# Altium PCB 驱动.pcbdoc (part 2 of 2)
Units mil, origin at the board's own origin, x right, y up, seen from the top; angles counter-clockwise.
Board outline 18731.41 x 3255.76 mil, 2 copper layers (Top Layer, Bottom Layer); 107 components, 212 nets, 609 pads, 80 vias.
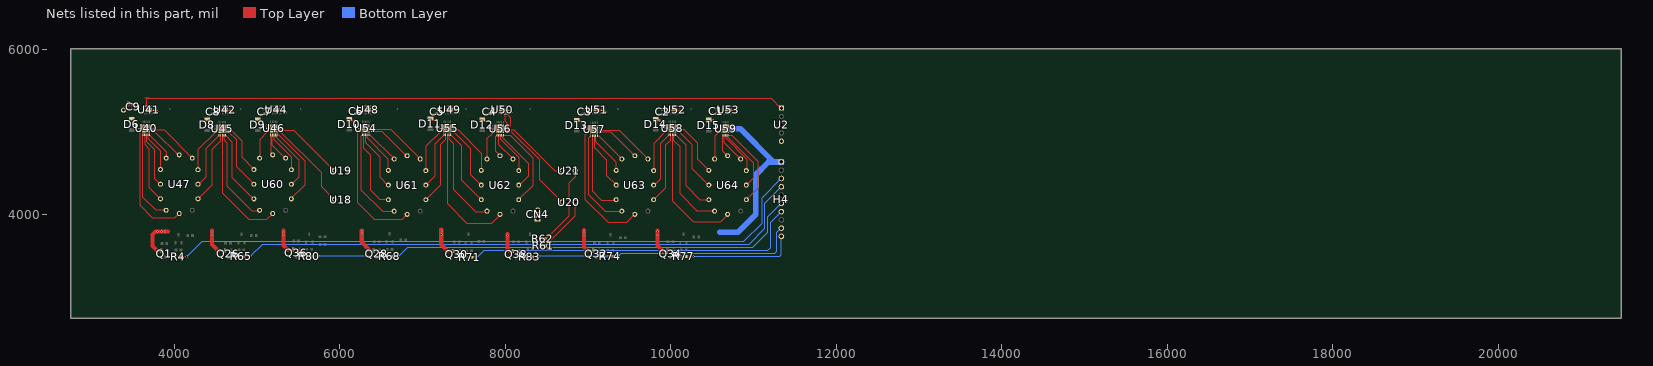
[diagram p2: the nets of this part, all layers, seen from the top]

## Via types
v1: diameter 24.02, hole 12.01, Top Layer to Bottom Layer, 80 vias

## Nets (pads, with @x,y where several pads share a name; then routed paths per layer and width w, separated by ;. In a path a pad name is that pad's centre, name@x,y a point inside that pad or via, vN(x,y) a via of type N, cw(c..) or ccw(c..) an arc to the next point about the centre after c; other vN are vias at no path point) (continued)
GND: C1.2 C2.2 C3.2 C4.2 C5.2 C6.2 C7.2 C8.2 C9.2 pad.1 U2.5 U41.8 U41.13 U41.17 U42.8 U42.13 U42.17 U44.8 U44.13 U44.17 U48.8 U48.13 U48.17 U49.8 U49.13 U49.17 U50.8 U50.13 U50.17 U51.8 U51.13 U51.17 U52.8 U52.13 U52.17 U53.8 U53.13 U53.17 | length 2066.7
  Top Layer w10: U41.13@3679.02,5315.26 3679.02,5281.68 3700.85,5259.85 U41.8@3754.12,5259.85 3785.3,5259.85 v1(3795.15,5250) ; v1(4415.15,5220) 4467.1,5220 C8.2@4468.27,5221.16 ; U42.13@4600.16,5315.26 4600.16,5273.67 4613.98,5259.85 U42.8@4675.26,5259.85 4700.3,5259.85 v1(4720.15,5240) ; v1(5045.15,5215) 5088.25,5215 C7.2@5093.22,5219.96 ; U44.13@5223.98,5315.81 5223.98,5271.99 5235.56,5260.4 U44.8@5299.07,5260.4 5329.75,5260.4 v1(5350.15,5240) ; v1(6145.15,5220) 6192.99,5220 C6.2@6195,5222.01 ; U48.13@6329.84,5316.2 6329.84,5272.12 6341.17,5260.79 U48.8@6404.94,5260.79 6429.36,5260.79 v1(6445.15,5245) ; v1(7130.15,5220) 7173.93,5220 C5.2@7175,5221.07 ; U49.13@7317.27,5315.54 7317.27,5260.13 U49.8@7392.37,5260.13 7420.02,5260.13 v1(7440.15,5240) ; v1(7765.15,5220) 7811.21,5220 C4.2@7812.28,5221.07 ; U50.13@7954.41,5314.87 7954.41,5273.9 7968.85,5259.46 U50.8@8029.51,5259.46 8055.69,5259.46 v1(8075.15,5240) ; v1(8915.15,5220) 8915.9,5220.75 C3.2@8959.25,5220.75 ; U51.13@9091.26,5314.55 9091.26,5263.89 9096.01,5259.14 U51.8@9166.36,5259.14 9201.01,5259.14 v1(9215.15,5245) ; v1(9855.15,5220) 9897.64,5220 C2.2@9900,5217.64 ; U52.13@10035.16,5314.55 10035.16,5274.94 10050.96,5259.14 U52.8@10110.26,5259.14 10141.01,5259.14 v1(10155.15,5245) ; v1(10505.15,5225) 10548.63,5225 C1.2@10550.22,5223.41 ; U53.13@10680.16,5316.36 10680.16,5273.03 10692.24,5260.95 U53.8@10755.26,5260.95 10794.2,5260.95 v1(10800.15,5255)
  Top Layer w30: v1(3440.15,5359.52) 3440.15,5343.09 v1(3440.15,5325) 3450.35,5335.2 C9.2@3500.75,5335.2
  Top Layer w50: 3437.06,5340 3440.15,5343.09
H0: U50.6 U56.20 | length 152.5
  Top Layer w10: U50.6@7993.78,5223.73 7993.78,5136.85 8015,5115.63 8015,5081.37 U56.20@8014.06,5080.43
H1: U50.7 U56.19 | length 222.5
  Top Layer w10: U50.7@8013.46,5223.73 8060,5177.19 8060,5070.63 8050,5060.63 8014.16,5060.63 U56.19@8014.06,5060.74
H_HV1: R61.1 U20.1 | length 674.3
  Top Layer w10: R61.1@8484.81,3630 8484.81,3631.13 8843.74,3990.06 U20.1@8843.74,4155.63
H_HV2: R62.1 U21.1 | length 971.6
  Top Layer w10: R62.1@8491.27,3710 8765.15,3983.88 8765.15,4382.04 8843.74,4460.63 U21.1@8843.74,4535.63
MOSI: U2.1 U41.14 | length 7836.1
  Top Layer w8: 3645,5410.63 3680,5410.63 ; U41.14@3659.33,5325.26 3659.33,5389.96 3680,5410.63 ; 3685,5415.63 3680,5410.63
  Top Layer w10: 3680,5410.63 11209.52,5410.63 U2.1@11330.15,5290
NIX_A0: U45.12 U47.0 | length 885.7
  Top Layer w10: U47.0@4285.2,4190.05 4460,4364.85 4460,4795.63 4560.78,4896.41 U45.12@4560.78,4961.62
NIX_A1: U40.11 U47.1 | length 1099.6
  Top Layer w10: U40.11@3619.96,4966.89 3619.96,4215.68 3780.63,4055 3900.03,4055 U47.1@3901.3,4056.27
NIX_A2: U40.12 U47.2 | length 854
  Top Layer w10: U40.12@3639.64,4966.89 3639.64,4851 3690,4800.63 3690,4335.15 U47.2@3832.4,4192.75
NIX_A3: U40.13 U47.3 | length 665.8
  Top Layer w10: U40.13@3659.33,4966.89 3659.33,4891.31 3760,4790.63 3760,4445.15 U47.3@3832.4,4372.75
NIX_A4: U40.14 U47.4 | length 482
  Top Layer w10: U40.14@3679.01,4966.89 3679.01,4926.63 3830,4775.63 3830,4550.87 U47.4@3832.4,4548.47
NIX_A5: U40.15 U47.5 | length 379.5
  Top Layer w10: U40.15@3698.7,4966.89 3901.3,4764.29 U47.5@3901.3,4686.27 U47.5@3901.3,4671.27
NIX_A6: U40.16 U47.6 | length 456.4
  Top Layer w10: U40.16@3738.07,5006.26 3764.37,5006.26 4058.8,4711.83 U47.6@4058.8,4725.57
NIX_A7: U40.17 U47.7 | length 618.9
  Top Layer w10: U40.17@3738.07,5025.94 3876.63,5025.94 U47.7@4216.3,4686.27
NIX_A8: U45.10 U47.8 | length 559.4
  Top Layer w10: U47.8@4285.2,4531.27 4285.2,4784.46 U45.10@4501.73,5000.99
NIX_A9: U45.11 U47.9 | length 707.6
  Top Layer w10: U47.9@4285.2,4360.05 4380,4454.85 4380,4800.52 U45.11@4541.1,4961.62
NIX_ADOT: U40.10 U47.DOT | length 1450.2
  Top Layer w10: U40.10@3580.59,5006.26 3580.59,4120.05 3735.63,3965 4006.83,3965 U47.DOT@4058.8,4016.97
NIX_B0: U46.15 U60.0 | length 983.2
  Top Layer w10: U46.15@5242.99,4965.95 5264.2,4965.95 5575,4655.15 5575,4359.85 U60.0@5414.4,4199.25
NIX_B1: U45.14 U60.1 | length 1150.6
  Top Layer w10: U45.14@4600.15,4961.62 4600.15,4905.48 4640,4865.63 4640,4346.99 4941.36,4045.63 5020.5,4045.63 U60.1@5030.5,4055.63
NIX_B2: U45.15 U60.2 | length 914.6
  Top Layer w10: U45.15@4619.84,4961.62 4695,4886.46 4695,4455.15 U60.2@4961.6,4188.55
NIX_B3: U45.16 U60.3 | length 752.7
  Top Layer w10: U45.16@4659.21,5000.99 4745,4915.2 4745,4590.15 U60.3@4961.6,4373.55
NIX_B4: U45.17 U60.4 | length 610.4
  Top Layer w10: U45.17@4659.21,5020.67 4689.97,5020.67 4815,4895.63 4815,4700.15 U60.4@4961.6,4553.55
NIX_B5: U46.10 U60.5 | length 373.8
  Top Layer w10: U60.5@5030.5,4670.63 5030.5,4910.94 U46.10@5124.88,5005.32
NIX_B6: U46.11 U60.6 | length 253.6
  Top Layer w10: U46.11@5164.25,4965.95 5164.25,4745.9 U60.6@5188,4722.15
NIX_B7: U46.12 U60.7 | length 353.2
  Top Layer w10: U46.12@5183.93,4965.95 5183.93,4841.22 U60.7@5345.5,4679.65
NIX_B8: U46.13 U60.8 | length 507.6
  Top Layer w10: U46.13@5203.62,4965.95 5203.62,4911.53 5414.4,4700.75 U60.8@5414.4,4545.63
NIX_B9: U46.14 U60.9 | length 755.9
  Top Layer w10: U46.14@5223.3,4965.95 5223.3,4946.85 5505,4665.15 5505,4454.85 U60.9@5414.4,4364.25
NIX_BDOT: U45.13 U60.DOT | length 1466.4
  Top Layer w10: U45.13@4580.47,4961.62 4580.47,4264.68 4900.15,3945 5116.67,3945 U60.DOT@5188,4016.33
NIX_C0: U55.12 U61.0 | length 881.6
  Top Layer w10: U61.0@7039.28,4184.13 7220,4364.85 7220,4855.63 7277.89,4913.53 U55.12@7277.89,4966.89
NIX_C1: U54.11 U61.1 | length 1176.8
  Top Layer w10: U54.11@6270.78,4967.32 6255,4951.53 6255,4305.63 6515.63,4045 6654.74,4045 U61.1@6655.38,4045.63
NIX_C2: U54.12 U61.2 | length 961.7
  Top Layer w10: U54.12@6290.46,4967.32 6290.46,4805.17 6375,4720.63 6375,4300.63 6490.63,4185 6584.91,4185 U61.2@6586.48,4183.43
NIX_C3: U54.13 U61.3 | length 728.1
  Top Layer w10: U54.13@6310.15,4967.32 6310.15,4870.48 6485,4695.63 6485,4455.15 U61.3@6586.48,4353.67
NIX_C4: U54.14 U61.4 | length 545.8
  Top Layer w10: U54.14@6329.83,4967.32 6329.83,4930.8 6586.48,4674.16 U61.4@6586.48,4527.83
NIX_C5: U54.15 U61.5 | length 426.7
  Top Layer w10: U54.15@6349.52,4967.32 6363.66,4967.32 U61.5@6655.38,4675.63
NIX_C6: U54.16 U61.6 | length 542.6
  Top Layer w10: U54.16@6388.89,5006.69 6513.46,5006.69 U61.6@6809.05,4711.1
NIX_C7: U54.17 U61.7 | length 726.8
  Top Layer w10: U54.17@6388.89,5026.37 6618.78,5026.37 6969.52,4675.63 U61.7@6970.38,4675.63
NIX_C8: U55.10 U61.8 | length 555
  Top Layer w10: U61.8@7039.28,4525.63 7039.28,4826.7 U55.10@7218.84,5006.26
NIX_C9: U55.11 U61.9 | length 696.9
  Top Layer w10: U61.9@7039.28,4360.63 7145,4466.36 7145,4853.68 U55.11@7258.21,4966.89
NIX_CDOT: U54.10 U61.DOT | length 1571.3
  Top Layer w10: U54.10@6231.41,5006.69 6210,4985.27 6210,4155.63 6415.63,3950 6756.54,3950 U61.DOT@6812.88,4006.33
NIX_D0: U56.15 U62.0 | length 1041.8
  Top Layer w10: U56.15@7974.69,4962.32 8057.83,4962.32 8330,4690.15 8330,4354.85 U62.0@8161.4,4186.25
NIX_D1: U55.14 U62.1 | length 1200
  Top Layer w10: U55.14@7317.26,4966.89 7317.26,4918.37 7370,4865.63 7370,4310.63 7640.63,4040 7771.87,4040 U62.1@7777.5,4045.63
NIX_D2: U55.15 U62.2 | length 939.3
  Top Layer w10: U55.15@7336.95,4966.89 7465,4838.85 7465,4425.15 U62.2@7708.6,4181.55
NIX_D3: U55.16 U62.3 | length 787.3
  Top Layer w10: U55.16@7376.32,5006.26 7575,4807.59 7575,4490.15 U62.3@7708.6,4356.55
NIX_D4: U55.17 U62.4 | length 672
  Top Layer w10: U55.17@7376.32,5025.94 7429.69,5025.94 7708.6,4747.03 U62.4@7708.6,4522.83
NIX_D5: U56.10 U62.5 | length 368.8
  Top Layer w10: U62.5@7777.5,4665.63 7777.5,4922.61 U56.10@7856.58,5001.69
NIX_D6: U56.11 U62.6 | length 280.6
  Top Layer w10: U56.11@7895.95,4962.32 7875.15,4941.52 7875.15,4775 U62.6@7935,4715.15
NIX_D7: U56.12 U62.7 | length 357.9
  Top Layer w10: U56.12@7915.63,4962.32 7915.63,4854.52 U62.7@8092.5,4677.65
NIX_D8: U56.13 U62.8 | length 535.3
  Top Layer w10: U56.13@7935.32,4962.32 7935.32,4919.83 8161.4,4693.75 U62.8@8161.4,4520.63
NIX_D9: U56.14 U62.9 | length 790.7
  Top Layer w10: U56.14@7955,4962.32 7955,4944.79 8275,4624.79 8275,4464.85 U62.9@8161.4,4351.25
NIX_DDOT: U55.13 U62.DOT | length 1612.7
  Top Layer w10: U55.13@7297.58,4966.89 7297.58,4138.05 7535.63,3900 7835.15,3900 7935,3999.85 U62.DOT@7935,4006.33
NIX_E0: U58.12 U63.0 | length 872.9
  Top Layer w10: U63.0@9791.4,4181.25 9940,4329.85 9940,4845.63 9997.63,4903.27 U58.12@9997.63,4968.68
NIX_E1: U57.11 U63.1 | length 1212.3
  Top Layer w10: U57.11@9031.54,4956.89 9005,4930.35 9005,4245.63 9210.63,4040 9401.87,4040 U63.1@9407.5,4045.63
NIX_E2: U57.12 U63.2 | length 1001.6
  Top Layer w10: U57.12@9051.22,4956.89 9051.22,4289.41 9160.63,4180 9335.17,4180 U63.2@9338.6,4183.43
NIX_E3: U57.13 U63.3 | length 706.2
  Top Layer w10: U57.13@9070.91,4956.89 9070.91,4814.72 9220,4665.63 9220,4480.15 U63.3@9338.6,4361.55
NIX_E4: U57.14 U63.4 | length 536.8
  Top Layer w10: U57.14@9090.59,4956.89 9090.59,4885.04 9338.6,4637.03 U63.4@9338.6,4522.83
NIX_E5: U57.15 U63.5 | length 412.1
  Top Layer w10: U57.15@9110.28,4956.89 9130.25,4956.89 U63.5@9407.5,4679.64
NIX_E6: U57.16 U63.6 | length 531.9
  Top Layer w10: U57.16@9149.65,4996.26 9278.89,4996.26 9560.22,4714.93 U63.6@9565,4714.93
NIX_E7: U57.17 U63.7 | length 713.8
  Top Layer w10: U57.17@9149.65,5015.94 9382.19,5015.94 U63.7@9722.5,4675.63
NIX_E8: U58.10 U63.8 | length 548.4
  Top Layer w10: U63.8@9791.4,4520.63 9791.4,4860.87 U58.10@9938.58,5008.05
NIX_E9: U58.11 U63.9 | length 692
  Top Layer w10: U63.9@9791.4,4360.63 9792.8,4359.23 9799.38,4359.23 9870,4429.85 9870,4860.73 U58.11@9977.95,4968.68
NIX_EDOT: U57.10 U63.DOT | length 1580.1
  Top Layer w10: U57.10@8992.17,4996.26 8960,4964.09 8960,4190.63 9240.63,3910 9468.67,3910 U63.DOT@9565,4006.33
NIX_F0: U59.15 U64.0 | length 1003.8
  Top Layer w10: U59.15@10699.18,4962.39 10733.24,4962.39 11050,4645.63 11050,4319.85 U64.0@10911.4,4181.25
NIX_F1: U58.14 U64.1 | length 1247.8
  Top Layer w10: U58.14@10037,4968.68 10037,4893.63 10110,4820.63 10110,4255.63 10320,4045.63 U64.1@10527.5,4045.63
NIX_F2: U58.15 U64.2 | length 1014.1
  Top Layer w10: U58.15@10056.69,4968.68 10180,4845.38 10180,4355.63 10350.63,4185 10457.03,4185 U64.2@10458.6,4183.43
NIX_F3: U58.16 U64.3 | length 801.7
  Top Layer w10: U58.16@10096.06,5008.05 10250,4854.12 10250,4565.15 U64.3@10458.6,4356.55
NIX_F4: U58.17 U64.4 | length 680.5
  Top Layer w10: U58.17@10096.06,5027.73 10162.9,5027.73 10325,4865.63 10325,4670.15 U64.4@10458.6,4536.55
NIX_F5: U59.10 U64.5 | length 358.3
  Top Layer w10: U64.5@10527.5,4665.63 10527.5,4948.19 U59.10@10581.07,5001.76
NIX_F6: U59.11 U64.6 | length 279
  Top Layer w10: U59.11@10620.44,4962.39 10620.44,4774.71 U64.6@10685,4710.15
NIX_F7: U59.12 U64.7 | length 384.4
  Top Layer w10: U59.12@10640.12,4962.39 10640.12,4875.03 U64.7@10850.15,4665
NIX_F8: U59.13 U64.8 | length 534
  Top Layer w10: U59.13@10659.81,4962.39 10659.81,4930.34 10915,4675.15 10915,4539.23 U64.8@10911.4,4535.63
NIX_F9: U59.14 U64.9 | length 771.6
  Top Layer w10: U59.14@10679.49,4962.39 10679.49,4945.29 10995.15,4629.62 10995.15,4440 U64.9@10911.4,4356.25
NIX_FDOT: U58.13 U64.DOT | length 1614.6
  Top Layer w10: U58.13@10017.32,4968.68 10017.32,4168.31 10270.63,3915 10600.15,3915 10685,3999.85 U64.DOT@10685,4006.33
NIX_G0: U18.2 U46.16 | length 1089.4
  Top Layer w10: U46.16@5282.36,5005.32 5775,4512.68 5775,4345.15 U18.2@5934.25,4185.9
NIX_G1: U19.2 U46.17 | length 854.6
  Top Layer w10: U46.17@5282.36,5025 5444.89,5025 U19.2@5934.25,4535.63
NIX_H0: U20.2 U56.16 | length 1164
  Top Layer w10: U56.16@8014.06,5001.69 8078.46,5001.69 8415,4665.15 8415,4425.15 U20.2@8686.26,4153.89
NIX_H1: U21.2 U56.17 | length 873.4
  Top Layer w10: U56.17@8014.06,5021.37 8109.27,5021.37 8595,4535.63 U21.2@8686.26,4535.63
PGND: CN4.1 CN4.2 D6.2 D8.2 D9.2 D10.2 D11.2 D12.2 D13.2 D14.2 D15.2 H4.1 pad.22 Q1.2 Q26.2 Q28.2 Q30.2 Q32.2 Q34.2 Q36.2 Q38.2 U40.8 U40.21 U45.8 U45.21 U46.8 U46.21 U54.8 U54.21 U55.8 U55.21 U56.8 U56.21 U57.8 U57.21 U58.8 U58.21 U59.8 U59.21 | length 6206.4
  Top Layer w10: U40.8@3580.59,5045.63 U40.21@3659.33,5045.63 ; U45.8@4501.73,5040.36 U45.21@4580.47,5040.36 ; U46.8@5124.88,5044.69 U46.21@5203.62,5044.69 ; U54.8@6231.41,5046.06 U54.21@6310.15,5046.06 ; U55.8@7218.84,5045.63 U55.21@7297.58,5045.63 ; U56.8@7856.58,5040.63 U56.21@7935.32,5040.63 ; U57.8@8992.17,5035.63 U57.21@9070.91,5035.63 ; U58.8@9938.58,5047.42 U58.21@10017.32,5047.42 ; U59.8@10581.07,5041.13 10582.19,5040 pad.22@10660.15,5040
  Top Layer w20: D6.2@3485,5159.8 3489.77,5159.8 v1(3530.05,5119.53) ; D8.2@4400,5157.56 4432.56,5125 v1(4460.15,5125) ; D9.2@5005,5157.56 5027.56,5135 v1(5065.15,5135) ; D10.2@6111.42,5162.56 6133.98,5140 v1(6170.15,5140) ; D11.2@7095,5167.56 7117.56,5145 v1(7160.15,5145) ; D12.2@7720,5157.56 7742.56,5135 v1(7785.15,5135) ; D13.2@8865,5150.69 8880.69,5135 v1(8920.15,5135) ; D14.2@9815,5162.56 9837.56,5140 v1(9870.15,5140) ; D15.2@10455,5152.56 10467.56,5140 v1(10515.15,5140)
  Top Layer w30: 3788.53,3569.37 Q1.2@3842.75,3569.37 ; 4529.71,3569.37 Q26.2@4612.75,3569.37 ; 5367.04,3579.37 Q36.2@5437.75,3579.37 ; 6360.78,3569.37 Q28.2@6407.75,3569.37 ; 7300.78,3564.37 Q30.2@7372.75,3564.37 ; 8050.78,3564.37 Q38.2@8092.75,3564.37 ; 8990.78,3569.37 Q32.2@9062.75,3569.37 ; 9900.78,3569.37 Q34.2@9957.75,3569.37
  Top Layer w50: 3788.53,3569.37 3735.15,3622.75 3735.15,3765 3770.5,3800.36 v1(3798.22,3800.36) v1(3844.81,3800.36) v1(3887.86,3800.36) 3925.15,3800.36 ; 4455.5,3810 v1(4455.5,3795.3) v1(4455.5,3757.43) 4455.5,3643.58 4529.71,3569.37 ; 5317.04,3810 v1(5317.04,3795.21) v1(5317.04,3757.33) 5317.04,3629.37 5367.04,3579.37 ; v1@6265.15,3810 v1(6265.15,3760.68) 6265.15,3665 6360.78,3569.37 ; 7225.15,3825 v1(7225.15,3807.27) v1(7225.15,3763.33) 7225.15,3640 7300.78,3564.37 ; 8025.15,3770 v1(8025.15,3752.91) 8025.15,3590 8050.78,3564.37 ; 8950.15,3815 v1(8950.15,3800.83) v1(8950.15,3759.92) 8950.15,3610 8990.78,3569.37 ; 9840.15,3810 v1(9840.15,3796.95) v1(9840.15,3759.07) 9840.15,3630 9900.78,3569.37
  Bottom Layer w70: 10590.15,3790 10810.15,3790 11025.15,4005 11025.15,4485 11180.15,4640 11240.15,4640 ; pad.22@10660.15,5040 10840.15,5040 11240.15,4640 ; H4.1@11335.15,4640 11240.15,4640
  other v1: 6265.15,3800.07
SWITCH1: H4.3 R4.1 | length 7855.8
  Top Layer w10: R4.1@4079.28,3495.4 4105.16,3495.4 4105.39,3495.63 v1(4150,3495.63)
  Bottom Layer w10: v1(4150,3495.63) 4329.37,3675 10875.15,3675 11095.15,3895 11095.15,4200 H4.3@11335.15,4440 H4.3@11365.15,4440
SWITCH2: H4.4 R65.1 | length 7051.9
  Top Layer w10: R65.1@4839.81,3500 4919.37,3500 v1(4920,3500.63)
  Bottom Layer w10: v1(4920,3500.63) 5059.37,3640 10940.15,3640 11130.15,3830 11130.15,4135 H4.4@11335.15,4340 H4.4@11365.15,4340
SWITCH3: H4.6 R68.1 R80.1 | length 6157
  Top Layer w10: R80.1@5659.21,3503.19 5747.59,3503.19 v1(5750.15,3500.63) ; R68.1@6634.21,3498.19 6660.09,3498.19 6662.53,3500.63 v1(6710,3500.63)
  Bottom Layer w10: v1(5750.15,3500.63) v1(6710,3500.63) 6814.37,3605 10985.15,3605 11165.15,3785 11165.15,3970 H4.6@11335.15,4140 H4.6@11365.15,4140
SWITCH4: H4.7 R71.1 | length 4175.3
  Top Layer w10: R71.1@7599.21,3488.19 7657.44,3488.19 v1(7660,3485.63)
  Bottom Layer w10: v1(7660,3485.63) 7739.37,3565 11165.15,3565 11200.15,3600 11200.15,3905 H4.7@11335.15,4040 H4.7@11365.15,4040
SWITCH5: H4.9 R74.1 R83.1 | length 3387.4
  Top Layer w10: R83.1@8326.84,3493.19 8398.65,3493.19 v1(8405,3499.54) ; R74.1@9294.81,3500 9320.68,3500 9321.9,3501.22 v1(9365,3501.22)
  Bottom Layer w10: v1(8405,3499.54) 8406.68,3501.22 v1(9365,3501.22) 9393.78,3530 11250.15,3530 11275.15,3555 11275.15,3785 11330.15,3840 H4.9@11365.15,3840
SWITCH6: H4.10 R77.1 | length 1393.4
  Top Layer w10: R77.1@10184.21,3498.19 10273.97,3498.19 v1(10275.15,3497.01)
  Bottom Layer w10: v1(10275.15,3497.01) 11312.16,3497.01 11325.15,3510 11325.15,3700 H4.10@11365.15,3740
pads on no net: H4.5 H4.8 U40.7 U40.18 U45.7 U45.18 U46.7 U46.18 U53.6 U53.7 U53.9 U54.7 U54.18 U55.7 U55.18 U56.7 U56.18 U57.7 U57.18 U58.7 U58.18 U59.7 U59.16 U59.17 U59.18 U59.19 U59.20

## Polygon pours and split planes (outlines as drawn)
PGND on Bottom Layer (solid, remove dead copper, pour order 0): 3400,4965.63 5665,4965.63 5740,5040.63 5890,5040.63 5975,4955.63 10755,4955.63 10755,5175.63 10755.04,5180.63 3400,5180.63
PGND on Bottom Layer (solid, remove dead copper, pour order 2): 8250.71,4149.39 8565.95,4149.39 8565.95,3895 10640.15,3895 10640.15,3715 3765.15,3715 3765.15,3895 8250.71,3895
GND on Bottom Layer (solid, remove dead copper, pour order 4): 11455.15,4941.05 11245.86,4941.05 11245,4996.53 10885.15,5290 10610.62,5290 10610.62,5246.83 10610,5246.21 10510.15,5246.21 10510.15,5292.86 9950.74,5292.86 9950.74,5235.59 9950.15,5235 9855.15,5235 9835.15,5275 9825.15,5293.36 9004.07,5293.36 9004.07,5239.99 8915.15,5239.99 8915.15,5293.36 7855.9,5293.36 7855.9,5240.99 7774.16,5240.99 7770.15,5245 7770.15,5293.36 7220.15,5293.36 7220.15,5237.5 7127.65,5237.5 7125.15,5240 7125.15,5293.86 6250.15,5293.86 6250.15,5243.15 6249.68,5242.68 6146.11,5242.68 6146.11,5294.86 5148.06,5294.86 5148.06,5242.92 5145.15,5240 5040.15,5240 5040.15,5295.36 4525.15,5295.36 4525.15,5240.26 4525,5240.11 4411.88,5240.11 4411.88,5293.27 4410.15,5295 3640.15,5295 3640.15,5240 3457.23,5240 3457.23,5310.32 3550.15,5310.32 3550.15,5435 3295.03,5435 3295.03,5199.12 10780.15,5199.12 11199.27,4780 11455.15,4780

## Keep-outs
Board Outline Layer:
  circle w1: c3160.15,5600 r66.93
  region: 3227.08,5600 cw(c3160.15,5600) 3093.22,5600 cw(c3160.15,5600)
  circle w1: c3155.15,3510 r66.93
  region: 3222.08,3510 cw(c3155.15,3510) 3088.22,3510 cw(c3155.15,3510)
  circle w1: c11600.15,3505 r66.93
  region: 11667.08,3505 cw(c11600.15,3505) 11533.22,3505 cw(c11600.15,3505)
  circle w1: c11605.15,5600 r66.93
  region: 11672.08,5600 cw(c11605.15,5600) 11538.22,5600 cw(c11605.15,5600)
  lines w10: 3000,3348.22 3005,5755.76 3915.15,5755.76 3915.15,5446.38 11245.15,5447.17 11245.15,5753.84 11760,5753.84 11760,3350.63 3200,3350.63 3000,3348.22

## Other copper
Top Layer:
  drawing of 699 lines, arcs and shapes, not listed
Bottom Layer:
  region net SWITCH6: 11336.1,3703.88 11321.61,3703.54 11322.13,3704.31 11322.26,3705.17 11322.06,3706.12 11321.57,3707.15 11319.87,3709.36 11317.5,3711.69 11312.12,3716.34 11309.78,3718.44 11308.13,3720.26 11357.77,3715.34 11356.13,3713.94 11354.6,3712.82 11351.79,3711.27 11349.23,3710.36 11346.8,3709.75 11344.38,3709.13 11341.87,3708.16 11340.54,3707.45 11339.15,3706.52 11337.67,3705.35
  region net SWITCH6: 11336.49,3704.27 11321.61,3703.54 11322.13,3704.31 11322.27,3705.19 11322.07,3706.15 11321.57,3707.19 11319.85,3709.42 11317.45,3711.78 11312.01,3716.48 11309.65,3718.61 11307.99,3720.45 11358.17,3715.72 11356.56,3714.29 11355.04,3713.16 11353.61,3712.27 11352.25,3711.59 11349.69,3710.67 11347.25,3710.08 11344.82,3709.48 11342.29,3708.53 11340.95,3707.82 11339.55,3706.91 11338.07,3705.74
  region net SWITCH5: 11302.07,3804.85 11298.73,3815.65 11299.68,3816.82 11300.44,3818.22 11301.02,3819.81 11301.45,3821.57 11301.94,3825.46 11302.06,3829.68 11301.84,3838.21 11301.84,3842.08 11302.12,3845.38 11333.47,3806.58 11330.9,3806.78 11328.48,3807.12 11324.01,3808.01 11319.96,3808.98 11316.22,3809.73 11314.43,3809.94 11312.68,3809.98 11310.94,3809.83 11309.21,3809.44 11307.47,3808.78 11305.71,3807.82 11303.92,3806.53
  region net SWITCH4: 11306.35,4004.13 11299.27,4011.2 11301.04,4013.12 11302.38,4014.94 11303.36,4016.67 11304,4018.35 11304.36,4019.99 11304.48,4021.61 11304.4,4023.24 11304.16,4024.89 11303.38,4028.39 11302.49,4032.26 11301.83,4036.69 11301.69,4039.17 11301.74,4041.86 11337.01,4006.59 11334.32,4006.54 11331.84,4006.68 11327.41,4007.34 11323.53,4008.23 11320.04,4009.01 11318.39,4009.25 11316.76,4009.33 11315.14,4009.22 11313.5,4008.85 11311.82,4008.21 11310.09,4007.23 11308.27,4005.89
  region net SWITCH3: 11306.35,4104.13 11299.27,4111.2 11301.04,4113.12 11302.38,4114.94 11303.36,4116.67 11304,4118.35 11304.36,4119.99 11304.48,4121.61 11304.4,4123.24 11304.16,4124.89 11303.38,4128.39 11302.49,4132.26 11301.83,4136.69 11301.69,4139.17 11301.74,4141.86 11337.01,4106.59 11334.32,4106.54 11331.84,4106.68 11327.41,4107.34 11323.53,4108.23 11320.04,4109.01 11318.39,4109.25 11316.76,4109.33 11315.14,4109.22 11313.5,4108.85 11311.82,4108.21 11310.09,4107.23 11308.27,4105.89
  region net SWITCH2: 11306.35,4304.13 11299.27,4311.2 11301.04,4313.12 11302.38,4314.94 11303.36,4316.67 11304,4318.35 11304.36,4319.99 11304.48,4321.61 11304.4,4323.24 11304.16,4324.89 11303.38,4328.39 11302.49,4332.26 11301.83,4336.69 11301.69,4339.17 11301.74,4341.86 11337.01,4306.59 11334.32,4306.54 11331.84,4306.68 11327.41,4307.34 11323.53,4308.23 11320.04,4309.01 11318.39,4309.25 11316.76,4309.33 11315.14,4309.22 11313.5,4308.85 11311.82,4308.21 11310.09,4307.23 11308.27,4305.89
  region net SWITCH1: 11306.35,4404.13 11299.27,4411.2 11301.04,4413.12 11302.38,4414.94 11303.36,4416.67 11304,4418.35 11304.36,4419.99 11304.48,4421.61 11304.4,4423.24 11304.16,4424.89 11303.38,4428.39 11302.49,4432.26 11301.83,4436.69 11301.69,4439.17 11301.74,4441.86 11337.01,4406.59 11334.32,4406.54 11331.84,4406.68 11327.41,4407.34 11323.53,4408.23 11320.04,4409.01 11318.39,4409.25 11316.76,4409.33 11315.14,4409.22 11313.5,4408.85 11311.82,4408.21 11310.09,4407.23 11308.27,4405.89
  region net CLK: 11301.88,5117.61 11307.54,5123.27 11309.41,5121.55 11311.17,5120.26 11312.84,5119.33 11314.43,5118.74 11315.99,5118.43 11317.52,5118.37 11319.06,5118.5 11320.63,5118.79 11327.61,5120.62 11331.88,5121.34 11334.28,5121.49 11336.9,5121.45 11303.7,5088.25 11303.66,5090.87 11303.81,5093.27 11304.53,5097.54 11306.36,5104.52 11306.65,5106.09 11306.78,5107.63 11306.72,5109.16 11306.41,5110.71 11305.82,5112.31 11304.89,5113.98 11303.6,5115.74
  region net SWITCH1: 4158.07,3510.77 4165.14,3503.7 4164.41,3502.85 4163.79,3501.87 4162.84,3499.66 4162.26,3497.28 4161.99,3494.97 4149.33,3507.62 4151.65,3507.89 4154.02,3508.47 4156.24,3509.42 4157.21,3510.04
  region net SWITCH2: 4928.07,3515.77 4935.14,3508.7 4934.41,3507.85 4933.79,3506.87 4932.84,3504.66 4932.26,3502.28 4931.99,3499.97 4919.33,3512.62 4921.65,3512.89 4924.02,3513.47 4926.24,3514.42 4927.21,3515.04
  region net SWITCH4: 7668.07,3500.77 7675.14,3493.7 7674.41,3492.85 7673.79,3491.87 7672.84,3489.66 7672.26,3487.28 7671.99,3484.97 7659.33,3497.62 7661.65,3497.89 7664.02,3498.47 7666.24,3499.42 7667.21,3500.04
  region net CLK: 5273.74,5346 5273.74,5354 5275.05,5354.11 5276.23,5354.43 5277.3,5354.91 5278.3,5355.55 5280.19,5357.13 5282.14,5358.95 5282.14,5341.05 5280.19,5342.87 5278.3,5344.45 5277.3,5345.09 5276.23,5345.57 5275.05,5345.89
  region net CLK: 5303.55,5359 5309.56,5351 5308.34,5350.87 5307.09,5350.5 5305.84,5349.93 5304.64,5349.19 5303.54,5348.31 5302.56,5347.33 5301.75,5346.28 5301.15,5345.2 5293.7,5361.47 5298.56,5359.77 5300.81,5359.21
  region net CLK: 3756.56,5354 3756.56,5346 3755.25,5345.89 3754.07,5345.57 3753,5345.09 3752,5344.45 3750.11,5342.87 3748.15,5341.05 3748.15,5358.95 3750.11,5357.13 3752,5355.55 3753,5354.91 3754.07,5354.43 3755.25,5354.11
  region net CLK: 4643.74,5346 4643.74,5354 4645.05,5354.11 4646.23,5354.43 4647.3,5354.91 4648.3,5355.55 4650.19,5357.13 4652.14,5358.95 4652.14,5341.05 4650.19,5342.87 4648.3,5344.45 4647.3,5345.09 4646.23,5345.57 4645.05,5345.89
  region net CLK: 4676.56,5354 4676.56,5346 4675.25,5345.89 4674.07,5345.57 4673,5345.09 4672,5344.45 4670.11,5342.87 4668.15,5341.05 4668.15,5358.95 4670.11,5357.13 4672,5355.55 4673,5354.91 4674.07,5354.43 4675.25,5354.11
  region net CLK: 8003.74,5351 8003.74,5359 8005.05,5359.11 8006.23,5359.43 8007.3,5359.91 8008.3,5360.55 8010.19,5362.13 8012.14,5363.95 8012.14,5346.05 8010.19,5347.87 8008.3,5349.45 8007.3,5350.09 8006.23,5350.57 8005.05,5350.89
  region net CLK: 8036.56,5359 8036.56,5351 8035.25,5350.89 8034.07,5350.57 8033,5350.09 8032,5349.45 8030.11,5347.87 8028.15,5346.05 8028.15,5363.95 8030.11,5362.13 8032,5360.55 8033,5359.91 8034.07,5359.43 8035.25,5359.11
  region net CLK: 10720.74,5351 10726.74,5359 10729.48,5359.21 10731.74,5359.77 10736.6,5361.47 10729.14,5345.2 10728.55,5346.28 10727.74,5347.33 10726.76,5348.31 10725.65,5349.19 10724.46,5349.93 10723.21,5350.5 10721.96,5350.87
  region net CLK: 10756.56,5354 10756.56,5346 10755.25,5345.89 10754.07,5345.57 10753,5345.09 10752,5344.45 10750.11,5342.87 10748.15,5341.05 10748.15,5358.95 10750.11,5357.13 10752,5355.55 10753,5354.91 10754.07,5354.43 10755.25,5354.11
  region net +5V: 3796.41,5323.13 3796.41,5308.13 3794.02,5308.23 3791.88,5308.26 3790.88,5308.14 3789.91,5307.86 3788.95,5307.4 3788.01,5306.68 3788.01,5324.58 3788.95,5323.87 3789.91,5323.4 3790.88,5323.13 3791.88,5323.01 3794.02,5323.04
  region net +5V: 3763.59,5308.13 3763.59,5323.13 3765.98,5323.04 3768.12,5323.01 3769.12,5323.13 3770.09,5323.4 3771.05,5323.87 3771.99,5324.58 3771.99,5306.68 3771.05,5307.4 3770.09,5307.86 3769.12,5308.14 3768.12,5308.26 3765.98,5308.23
  region net +5V: 3601.3,5297.54 3611.91,5286.93 3610.15,5285.31 3608.62,5283.82 3608,5283.03 3607.5,5282.15 3607.16,5281.14 3606.99,5279.97 3594.33,5292.62 3595.51,5292.79 3596.51,5293.13 3597.39,5293.63 3598.19,5294.25 3599.68,5295.79
  region net +5V: 3578.59,5273.13 3578.59,5288.13 3580.98,5288.04 3583.12,5288.01 3584.12,5288.13 3585.09,5288.4 3586.05,5288.87 3586.99,5289.58 3586.99,5271.68 3586.05,5272.4 3585.09,5272.86 3584.12,5273.14 3583.12,5273.26 3580.98,5273.23
  region net CLK: 6378.74,5351 6378.74,5359 6380.05,5359.11 6381.23,5359.43 6382.3,5359.91 6383.3,5360.55 6385.19,5362.13 6387.14,5363.95 6387.14,5346.05 6385.19,5347.87 6383.3,5349.45 6382.3,5350.09 6381.23,5350.57 6380.05,5350.89
  region net CLK: 6411.56,5359 6411.56,5351 6410.25,5350.89 6409.07,5350.57 6408,5350.09 6407,5349.45 6405.11,5347.87 6403.15,5346.05 6403.15,5363.95 6405.11,5362.13 6407,5360.55 6408,5359.91 6409.07,5359.43 6410.25,5359.11
  region net +5V: 5333.59,5308.31 5333.59,5323.31 5335.98,5323.22 5338.12,5323.18 5339.12,5323.31 5340.09,5323.58 5341.05,5324.05 5341.99,5324.76 5341.99,5306.86 5341.05,5307.57 5340.09,5308.04 5339.12,5308.31 5338.12,5308.43 5335.98,5308.4
  region net +5V: 5366.41,5323.31 5366.41,5308.31 5364.02,5308.4 5361.88,5308.43 5360.88,5308.31 5359.91,5308.04 5358.95,5307.57 5358.01,5306.86 5358.01,5324.76 5358.95,5324.05 5359.91,5323.58 5360.88,5323.31 5361.88,5323.18 5364.02,5323.22
  region net SWITCH5: 8420.08,3506.22 8422.58,3496.22 8421.47,3496.12 8420.31,3495.84 8418,3494.84 8415.87,3493.42 8414.18,3491.8 8411.68,3509.52 8413.61,3508.31 8415.69,3507.25 8417.86,3506.5
  region net SWITCH3: 6693.59,3495.63 6693.59,3505.63 6694.71,3505.72 6695.84,3505.97 6698.07,3506.87 6700.17,3508.13 6701.99,3509.58 6701.99,3491.68 6700.17,3493.13 6698.07,3494.4 6695.84,3495.29 6694.71,3495.55
  region net SWITCH3: 6718.07,3515.77 6725.14,3508.7 6724.41,3507.85 6723.79,3506.87 6722.84,3504.66 6722.26,3502.28 6721.99,3499.97 6709.33,3512.62 6711.65,3512.89 6714.02,3513.47 6716.24,3514.42 6717.21,3515.04
  region net +5V: 7461.41,5323.04 7461.41,5308.04 7459.02,5308.13 7456.88,5308.16 7455.88,5308.04 7454.91,5307.77 7453.95,5307.3 7453.01,5306.59 7453.01,5324.49 7453.95,5323.77 7454.91,5323.31 7455.88,5323.03 7456.88,5322.91 7459.02,5322.94
  region net +5V: 7428.59,5308.04 7428.59,5323.04 7430.98,5322.94 7433.12,5322.91 7434.12,5323.03 7435.09,5323.31 7436.05,5323.77 7436.99,5324.49 7436.99,5306.59 7436.05,5307.3 7435.09,5307.77 7434.12,5308.04 7433.12,5308.16 7430.98,5308.13
  region net CLK: 7358.74,5351 7358.74,5359 7360.05,5359.11 7361.23,5359.43 7362.3,5359.91 7363.3,5360.55 7365.19,5362.13 7367.14,5363.95 7367.14,5346.05 7365.19,5347.87 7363.3,5349.45 7362.3,5350.09 7361.23,5350.57 7360.05,5350.89
  region net CLK: 7391.56,5359 7391.56,5351 7390.25,5350.89 7389.07,5350.57 7388,5350.09 7387,5349.45 7385.11,5347.87 7383.15,5346.05 7383.15,5363.95 7385.11,5362.13 7387,5360.55 7388,5359.91 7389.07,5359.43 7390.25,5359.11
  region net +5V: 9861.45,5296.91 9872.06,5286.3 9870.3,5284.68 9868.77,5283.19 9868.15,5282.39 9867.65,5281.51 9867.31,5280.51 9867.14,5279.33 9854.48,5291.99 9855.65,5292.16 9856.66,5292.5 9857.54,5293 9858.34,5293.62 9859.83,5295.15
  region net +5V: 9838.24,5286.3 9848.85,5296.91 9850.47,5295.15 9851.96,5293.62 9852.76,5293 9853.64,5292.5 9854.64,5292.16 9855.82,5291.99 9843.16,5279.33 9842.99,5280.51 9842.65,5281.51 9842.15,5282.39 9841.53,5283.19 9840,5284.68
  region net CLK: 10078.74,5351 10078.74,5359 10080.05,5359.11 10081.23,5359.43 10082.3,5359.91 10083.3,5360.55 10085.19,5362.13 10087.14,5363.95 10087.14,5346.05 10085.19,5347.87 10083.3,5349.45 10082.3,5350.09 10081.23,5350.57 10080.05,5350.89
  region net CLK: 10111.56,5359 10111.56,5351 10110.25,5350.89 10109.07,5350.57 10108,5350.09 10107,5349.45 10105.11,5347.87 10103.15,5346.05 10103.15,5363.95 10105.11,5362.13 10107,5360.55 10108,5359.91 10109.07,5359.43 10110.25,5359.11
  region net CLK: 9171.56,5359 9171.56,5351 9170.25,5350.89 9169.07,5350.57 9168,5350.09 9167,5349.45 9165.11,5347.87 9163.15,5346.05 9163.15,5363.95 9165.11,5362.13 9167,5360.55 9168,5359.91 9169.07,5359.43 9170.25,5359.11
  region net CLK: 9138.74,5351 9138.74,5359 9140.05,5359.11 9141.23,5359.43 9142.3,5359.91 9143.3,5360.55 9145.19,5362.13 9147.14,5363.95 9147.14,5346.05 9145.19,5347.87 9143.3,5349.45 9142.3,5350.09 9141.23,5350.57 9140.05,5350.89
  region net +5V: 3556.08,5288.13 3557.02,5273.13 3554.62,5273.21 3552.45,5273.2 3551.44,5273.05 3550.46,5272.75 3549.53,5272.24 3548.62,5271.48 3547.67,5289.36 3548.66,5288.69 3549.63,5288.26 3550.6,5288.03 3551.59,5287.94
  region net +5V: 7771.45,5296.91 7782.06,5286.3 7780.3,5284.68 7778.77,5283.19 7778.15,5282.39 7777.65,5281.51 7777.31,5280.51 7777.14,5279.33 7764.48,5291.99 7765.65,5292.16 7766.66,5292.5 7767.54,5293 7768.34,5293.62 7769.83,5295.15
  region net +5V: 7748.24,5286.3 7758.85,5296.91 7760.47,5295.15 7761.96,5293.62 7762.76,5293 7763.64,5292.5 7764.64,5292.16 7765.82,5291.99 7753.16,5279.33 7752.99,5280.51 7752.65,5281.51 7752.15,5282.39 7751.53,5283.19 7750,5284.68
  region net +5V: 4691.13,5307.76 4691.13,5322.76 4693.52,5322.67 4695.65,5322.63 4696.66,5322.75 4697.63,5323.03 4698.58,5323.5 4699.53,5324.21 4699.53,5306.31 4698.58,5307.02 4697.63,5307.49 4696.66,5307.76 4695.65,5307.88 4693.52,5307.85
  region net +5V: 4723.95,5322.76 4723.95,5307.76 4721.56,5307.85 4719.42,5307.88 4718.42,5307.76 4717.45,5307.49 4716.49,5307.02 4715.54,5306.31 4715.54,5324.21 4716.49,5323.5 4717.45,5323.03 4718.42,5322.75 4719.42,5322.63 4721.56,5322.67
  region net +5V: 6433.59,5308.7 6433.59,5323.7 6435.98,5323.61 6438.12,5323.58 6439.12,5323.7 6440.09,5323.97 6441.05,5324.44 6441.99,5325.15 6441.99,5307.25 6441.05,5307.97 6440.09,5308.43 6439.12,5308.71 6438.12,5308.83 6435.98,5308.8
  region net +5V: 6466.41,5323.7 6466.41,5308.7 6464.02,5308.8 6461.88,5308.83 6460.88,5308.71 6459.91,5308.43 6458.95,5307.97 6458.01,5307.25 6458.01,5325.15 6458.95,5324.44 6459.91,5323.97 6460.88,5323.7 6461.88,5323.58 6464.02,5323.61
  region net +5V: 5051.45,5296.91 5062.06,5286.3 5060.3,5284.68 5058.77,5283.19 5058.15,5282.39 5057.65,5281.51 5057.31,5280.51 5057.14,5279.33 5044.48,5291.99 5045.65,5292.16 5046.66,5292.5 5047.54,5293 5048.34,5293.62 5049.83,5295.15
  region net +5V: 5028.24,5286.3 5038.85,5296.91 5040.47,5295.15 5041.96,5293.62 5042.76,5293 5043.64,5292.5 5044.64,5292.16 5045.82,5291.99 5033.16,5279.33 5032.99,5280.51 5032.65,5281.51 5032.15,5282.39 5031.53,5283.19 5030,5284.68
  region net +5V: 7113.24,5286.3 7123.85,5296.91 7125.47,5295.15 7126.96,5293.62 7127.76,5293 7128.64,5292.5 7129.64,5292.16 7130.82,5291.99 7118.16,5279.33 7117.99,5280.51 7117.65,5281.51 7117.15,5282.39 7116.53,5283.19 7115,5284.68
  region net +5V: 7136.45,5296.91 7147.06,5286.3 7145.3,5284.68 7143.77,5283.19 7143.15,5282.39 7142.65,5281.51 7142.31,5280.51 7142.14,5279.33 7129.48,5291.99 7130.65,5292.16 7131.66,5292.5 7132.54,5293 7133.34,5293.62 7134.83,5295.15
  region net +5V: 6151.45,5296.91 6162.06,5286.3 6160.3,5284.68 6158.77,5283.19 6158.15,5282.39 6157.65,5281.51 6157.31,5280.51 6157.14,5279.33 6144.48,5291.99 6145.65,5292.16 6146.66,5292.5 6147.54,5293 6148.34,5293.62 6149.83,5295.15
  region net +5V: 6128.24,5286.3 6138.85,5296.91 6140.47,5295.15 6141.96,5293.62 6142.76,5293 6143.64,5292.5 6144.64,5292.16 6145.82,5291.99 6133.16,5279.33 6132.99,5280.51 6132.65,5281.51 6132.15,5282.39 6131.53,5283.19 6130,5284.68
  region net +5V: 8898.24,5286.3 8908.85,5296.91 8910.47,5295.15 8911.96,5293.62 8912.76,5293 8913.64,5292.5 8914.64,5292.16 8915.82,5291.99 8903.16,5279.33 8902.99,5280.51 8902.65,5281.51 8902.15,5282.39 8901.53,5283.19 8900,5284.68
  region net +5V: 8921.45,5296.91 8932.06,5286.3 8930.3,5284.68 8928.77,5283.19 8928.15,5282.39 8927.65,5281.51 8927.31,5280.51 8927.14,5279.33 8914.48,5291.99 8915.65,5292.16 8916.66,5292.5 8917.54,5293 8918.34,5293.62 8919.83,5295.15
  region net +5V: 10778.59,5308.86 10778.59,5323.86 10780.98,5323.77 10783.12,5323.74 10784.12,5323.86 10785.09,5324.13 10786.05,5324.6 10786.99,5325.31 10786.99,5307.41 10786.05,5308.13 10785.09,5308.59 10784.12,5308.87 10783.12,5308.99 10780.98,5308.96
  region net +5V: 10133.59,5307.05 10133.59,5322.05 10135.98,5321.96 10138.12,5321.93 10139.12,5322.05 10140.09,5322.32 10141.05,5322.79 10141.99,5323.5 10141.99,5305.6 10141.05,5306.31 10140.09,5306.78 10139.12,5307.05 10138.12,5307.17 10135.98,5307.14
  region net +5V: 10166.41,5322.05 10166.41,5307.05 10164.02,5307.14 10161.88,5307.17 10160.88,5307.05 10159.91,5306.78 10158.95,5306.31 10158.01,5305.6 10158.01,5323.5 10158.95,5322.79 10159.91,5322.32 10160.88,5322.05 10161.88,5321.93 10164.02,5321.96
  region net +5V: 10488.24,5286.3 10498.85,5296.91 10500.47,5295.15 10501.96,5293.62 10502.76,5293 10503.64,5292.5 10504.64,5292.16 10505.82,5291.99 10493.16,5279.33 10492.99,5280.51 10492.65,5281.51 10492.15,5282.39 10491.53,5283.19 10490,5284.68
  region net +5V: 10511.45,5296.91 10522.06,5286.3 10520.3,5284.68 10518.77,5283.19 10518.15,5282.39 10517.65,5281.51 10517.31,5280.51 10517.14,5279.33 10504.48,5291.99 10505.65,5292.16 10506.66,5292.5 10507.54,5293 10508.34,5293.62 10509.83,5295.15
  region net +5V: 9231.41,5322.05 9231.41,5307.05 9229.02,5307.14 9226.88,5307.17 9225.88,5307.05 9224.91,5306.78 9223.95,5306.31 9223.01,5305.6 9223.01,5323.5 9223.95,5322.79 9224.91,5322.32 9225.88,5322.05 9226.88,5321.93 9229.02,5321.96
  region net +5V: 9198.59,5307.05 9198.59,5322.05 9200.98,5321.96 9203.12,5321.93 9204.12,5322.05 9205.09,5322.32 9206.05,5322.79 9206.99,5323.5 9206.99,5305.6 9206.05,5306.31 9205.09,5306.78 9204.12,5307.05 9203.12,5307.17 9200.98,5307.14
  region net +5V: 8058.59,5307.37 8058.59,5322.37 8060.98,5322.28 8063.12,5322.25 8064.12,5322.37 8065.09,5322.64 8066.05,5323.11 8066.99,5323.82 8066.99,5305.92 8066.05,5306.63 8065.09,5307.1 8064.12,5307.37 8063.12,5307.49 8060.98,5307.46
  region net +5V: 8091.41,5322.37 8091.41,5307.37 8089.02,5307.46 8086.88,5307.49 8085.88,5307.37 8084.91,5307.1 8083.95,5306.63 8083.01,5305.92 8083.01,5323.82 8083.95,5323.11 8084.91,5322.64 8085.88,5322.37 8086.88,5322.25 8089.02,5322.28
  region net +5V: 4421.45,5296.91 4432.06,5286.3 4430.3,5284.68 4428.77,5283.19 4428.15,5282.39 4427.65,5281.51 4427.31,5280.51 4427.14,5279.33 4414.48,5291.99 4415.65,5292.16 4416.66,5292.5 4417.54,5293 4418.34,5293.62 4419.83,5295.15
  region net +5V: 4398.24,5286.3 4408.85,5296.91 4410.47,5295.15 4411.96,5293.62 4412.76,5293 4413.64,5292.5 4414.64,5292.16 4415.82,5291.99 4403.16,5279.33 4402.99,5280.51 4402.65,5281.51 4402.15,5282.39 4401.53,5283.19 4400,5284.68
  region net SWITCH6: 10291.56,3502.01 10291.56,3492.01 10290.44,3491.92 10289.31,3491.67 10287.07,3490.77 10284.98,3489.51 10283.15,3488.06 10283.15,3505.96 10284.98,3504.51 10287.07,3503.24 10289.31,3502.35 10290.44,3502.1
  region net SWITCH5: 9348.59,3496.22 9348.59,3506.22 9349.71,3506.31 9350.84,3506.56 9353.07,3507.45 9355.17,3508.72 9356.99,3510.17 9356.99,3492.27 9355.17,3493.72 9353.07,3494.98 9350.84,3495.88 9349.71,3496.13
  region net SWITCH5: 9373.07,3516.36 9380.14,3509.29 9379.41,3508.43 9378.79,3507.45 9377.84,3505.24 9377.26,3502.87 9376.99,3500.55 9364.33,3513.21 9366.65,3513.47 9369.02,3514.06 9371.24,3515 9372.21,3515.63
  region net SWITCH3: 5766.56,3505.63 5766.56,3495.63 5765.44,3495.55 5764.31,3495.29 5762.07,3494.4 5759.98,3493.13 5758.15,3491.68 5758.15,3509.58 5759.98,3508.13 5762.07,3506.87 5764.31,3505.97 5765.44,3505.72

## Silkscreen, mask and mechanical layers (free items; w line width, h text height)
Top Silkscreen Layer:
  text "宽距应该设置为3倍窄距+窄距-实际窄距 = 700mil" at 5170.15,3000 h120
Bottom Silkscreen Layer:
  text "\"Now I am become Death, the destroyer of worlds.\"" at 11310.15,5095 h314.96
  text "श्री भगवानुवाच कालोऽस्मि लोकक्षयकृत्प्रवृद्धो" at 10775.15,3395 h393.7
Mechanical Layer:
  circle w1: c3160.15,5600 r66.93
  circle w1: c3155.15,3510 r66.93
  circle w1: c11600.15,3505 r66.93
  circle w1: c11605.15,5600 r66.93

## Text inside footprints (layer, text, board x,y; h text height)
U18: Top Silkscreen Layer "正面" at 6052.99,4280.63 h39.37 r180
U19: Top Silkscreen Layer "正面" at 6052.99,4630.63 h39.37 r180
U20: Top Silkscreen Layer "正面" at 8805,4250.63 h39.37 r180
U21: Top Silkscreen Layer "正面" at 8805,4630.63 h39.37 r180